# Altium PCB Smartphone-HT.PcbDoc
Units mm, origin at the board's own origin, x right, y up, seen from the top; angles counter-clockwise.
Board outline 20.83 x 13.21 mm, 2 copper layers (Top Layer, Bottom Layer); 6 components, 5 nets, 16 pads, 6 vias.
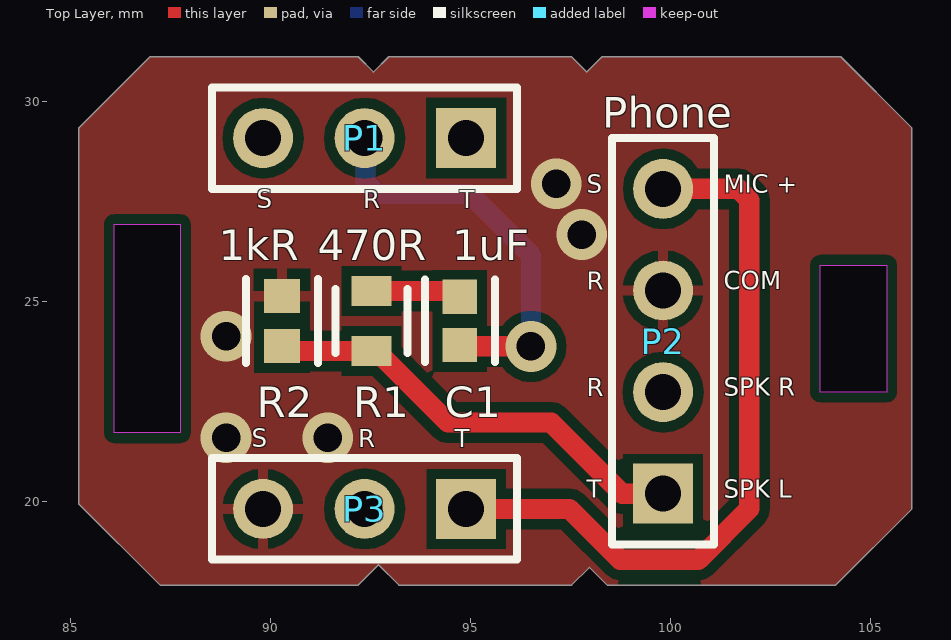
[diagram p0: Top Layer view]
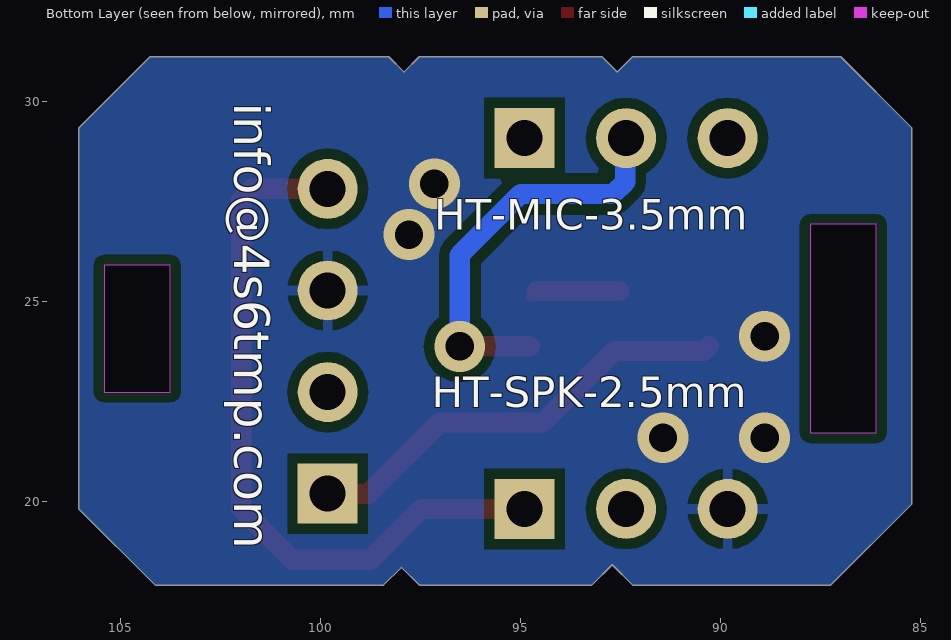
[diagram p1: Bottom Layer view, seen from below]
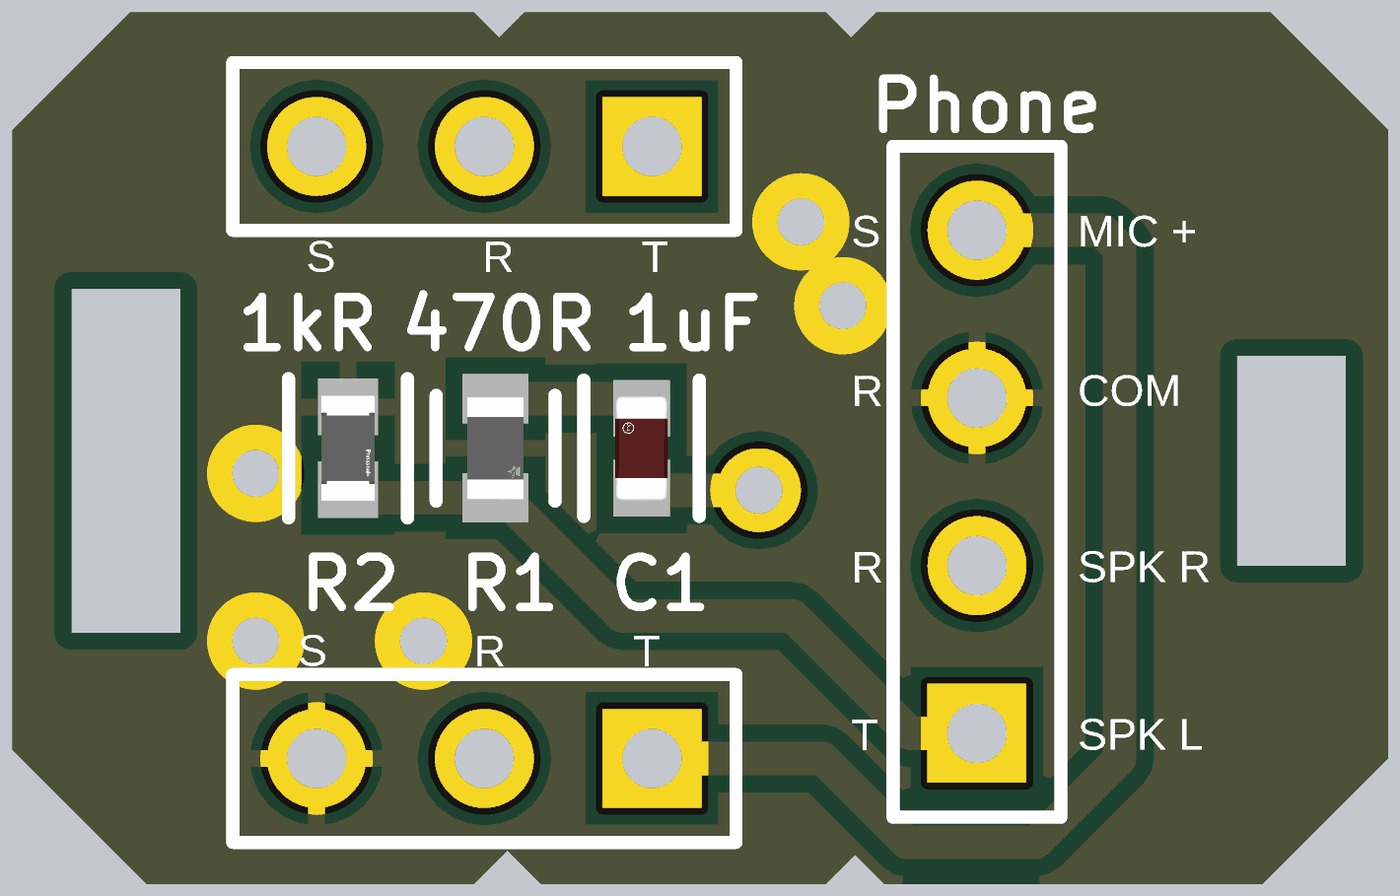
[diagram p2: 3D render of the assembled board from above, using the file's embedded part models]

## Layer stack, top to bottom
Top Solder: solder mask 0.0102, Solder Resist, Dk 3.5
Top Layer: signal copper 0.0356
Dielectric 1: dielectric 0.32, FR-4, Dk 4.8
Bottom Layer: signal copper 0.0356
Bottom Solder: solder mask 0.0102, Solder Resist, Dk 3.5

## Board outline
97.536,17.907 97.981,18.351 98.425,17.907 104.14,17.907 106.045,19.812 106.045,29.337 104.267,31.115 98.298,31.115 97.917,30.734 97.536,31.115 92.964,31.115 92.583,30.734 92.202,31.115 86.995,31.115 85.217,29.337 85.217,19.939 87.249,17.907 92.202,17.907 92.71,18.415 93.218,17.907
cut-out: 103.759,24.511 103.759,25.908 105.41,25.908 105.41,22.733 103.759,22.733
cut-out: 86.106,24.892 86.106,26.924 87.757,26.924 87.757,21.717 86.106,21.717

## Design rules (kind name [scope] priority, off if disabled: settings)
Clearance [All] p1: gap=0.254 ignorepadtopadclearanceinfootprint=FALSE except(0: Arc-Hole Track-Hole SMDPad-Hole THPad-Hole Via-Hole Fill-Hole Poly-Hole Region-Hole Text-Hole)
PolygonConnect [All] p1: connectstyle=Relief reliefconductorwidth=0.254 reliefentries=4 polygonreliefangle="90 Angle" airgapwidth=0.254
RoomDefinition Smartphone-HT [InComponentClass('Smartphone-HT')] p1: confinementstyle=ConfineIn formatcopy=TRUE lockcomponents=FALSE outline 85.217,17.907 106.045,17.907 106.045,31.115 85.217,31.115
RoutingVias [All] p1: holewidth=0.711 width=1.27 viastyle="Through Hole" minholewidth=0.711 minwidth=1.27 maxholewidth=0.711 maxwidth=1.27
SolderMaskExpansion [All] p1: expansion=0.102 istentingtop=FALSE
Width [All] p1: maxlimit=0.762 minlimit=0.254 preferedwidth=0.508
30 further rules are at their usual default settings.

## Components (designator, comment, footprint, x,y, rotation, side; value= is the part's Value field where it differs from the comment)
C1 "1uF" FP-0603-L_1_6_0_15-W_0_8-IPC_C 94.742,24.511 r90 top
P1 "HT-MIC-3.5mm" HDR1X3 94.902,29.083 r180 top
P2 "Phone" HDR1X4 99.822,20.193 r90 top
P3 "HT-SPK-2.5mm" HDR1X3 94.902,19.812 r180 top
R1 "470R" FP-CRCW0603-e3-MFG 92.532,24.511 r270 top
R2 "1kR" FP-ERA3A-IPC_C 90.297,24.511 r270 top

## Footprints (in the part's own frame and the unit in brackets; to place one, negate y for a bottom-side part, rotate by r counter-clockwise, add the part's x,y. Pads: shape width x height; smd on the part's side, far side on the other; paste and mask are expansions set on the pad)
FP-0603-L_1_6_0_15-W_0_8-IPC_C [mm]
  rect 0.858x0.862 smd paste+0 mask+0: 1(-0.602,0) 2(0.602,0)
  silkscreen extent -1.03,-0.87 1.03,0.87, body extent -1.13,-0.58 1.13,0.58, height 0.25
FP-CRCW0603-e3-MFG [mm]
  rect 0.75x1 smd paste+0 mask+0: 1(-0.75,0) 2(0.75,0)
  silkscreen extent -0.8,-0.9 0.8,0.9, body extent -1.22,-0.6 1.22,0.6, height 0.25
FP-ERA3A-IPC_C [mm]
  rect 0.855x0.906 smd paste+0 mask+0: 1(-0.626,0) 2(0.626,0)
  silkscreen extent -1.05,-0.9 1.05,0.9, body extent -1.15,-0.6 1.15,0.6, height 0.25
HDR1X3 [mm] "Connector; Header; 3 Position"
  rect 1.5x1.5 hole 0.9: 1(0,0)
  round 1.5 hole 0.9: 2(2.54,0) 3(5.08,0)
  silkscreen extent -1.27,-1.27 6.35,1.27
HDR1X4 [mm] "Connector; Header; 4 Position"
  rect 1.5x1.5 hole 0.9: 1(0,0)
  round 1.5 hole 0.9: 2(2.54,0) 3(5.08,0) 4(7.62,0)
  silkscreen extent -1.27,-1.27 8.89,1.27

## Part data
C1: library part CMP-2000-07531-4, "Ceramic Capacitor General Use 1uF ±10% 50V X7R 0603", Case Code (Imperial)=0603, Case Code (Metric)=1608, Dielectric=X7R, Max Operating Temperature=125°C, Min Operating Temperature=-55°C, Package Quantity=1, Tolerance=10%, Voltage Rating=50V, Capacitance=1uF, Case/Package=0603, Construction=Flat, Depth=0.8mm, Halogen Free="Halogen Free", Height=0.8mm, Length=1.6mm, Mount="Surface Mount", Packaging="Tape and Reel", Radiation Hardening=No, RoHS Compliant=Yes, Series=M, Termination=SMD/SMT, Thickness=0.037inch, Voltage Rating (DC)=50V, Width=0.031inch
P1 P3: library part "Header 3", "Header, 3-Pin", LatestRevisionDate=17-Jul-2002, LatestRevisionNote="Re-released for DXP Platform.", Publisher="Altium Limited"
P2: library part "Header 4", "Header, 4-Pin", LatestRevisionDate=17-Jul-2002, LatestRevisionNote="Re-released for DXP Platform.", Publisher="Altium Limited"
R1: library part CMP-2000-03373-2, "RES Thick Film, 470Ω, 1%, 0.1W, 100ppm/°C, 0603", Case Code (Imperial)=0603, Case Code (Metric)=1608, Max Operating Temperature=155°C, Max Power Dissipation=100mW, Min Operating Temperature=-55°C, Package Quantity=10, Temperature Coefficient=100ppm/°C, Tolerance=1%, Voltage Rating=75V, Case/Package=0603, Composition="Thick Film", Contact Plating=Tin, Depth=0.85mm, Features="Automotive AEC-Q200", Height=0.45mm, Lead Free="Lead Free", Length=1.55mm, Military Standard=Not, Mount="Surface Mount", Number of Terminations=2, Packaging="Tape and Reel", Power Rating=100mW, Radiation Hardening=No, Resistance=470R, Termination=SMD/SMT, Voltage Rating (DC)=75V, Weight=7.1E-05oz, Width=0.033inch
R2: library part CMP-2000-00873-2, "RES SMD 1K OHM 0.1% 1/10W 0603", Case Code (Imperial)=0603, Case Code (Metric)=1608, Max Operating Temperature=155°C, Max Power Dissipation=100mW, Min Operating Temperature=-55°C, Package Quantity=5000, Resistance Tolerance=0.1%, Resistor Type="Thin Film", Temperature Coefficient=25ppm/°C, Voltage Rating=75V, Case/Package=0603, Construction=Rectangular, Contact Plating=Tin, Depth=0.8mm, Height=0.45mm, Length=1.6mm, Military Standard=Not, Mount="Surface Mount", Number of Pins=2, Number of Terminations=2, Packaging="Tape and Reel", Power Rating=100mW, Radiation Hardening=No, REACH SVHC="No SVHC", Resistance=1kR, RoHS Compliant=Yes, Series=ERA-3A, Size Code=0603, Technology="METAL FILM", Termination=SMD/SMT, Tolerance=0.1%, Width=0.8mm

## Via types
v1: diameter 1.27, hole 0.711, Top Layer to Bottom Layer, 6 vias

## Nets (pads, with @x,y where several pads share a name; then routed paths per layer and width w, separated by ;. In a path a pad name is that pad's centre, name@x,y a point inside that pad or via, vN(x,y) a via of type N, cw(c..) or ccw(c..) an arc to the next point about the centre after c; other vN are vias at no path point)
NetC1_1: C1.1 P1.2 | length 10.1
  Top Layer w0.254: C1.1 C1.1@94.775,23.876
  Top Layer w0.508: C1.1@94.775,23.876 v1(96.52,23.876)
  Bottom Layer w0.508: P1.2 92.385,29.06 92.385,27.984 92.682,27.686 94.996,27.686 96.52,26.162 v1(96.52,23.876)
NetC1_2: C1.2 R1.1 | length 2.3
  Top Layer w0.254: C1.2@94.594,25.261 C1.2
  Top Layer w0.508: R1.1 C1.2@94.594,25.261
NetP2_1: P2.1 R1.2 R2.2 | length 11.1
  Top Layer w0.508: R2.2 90.421,23.761 R1.2 92.657,23.761 94.447,21.971 97.028,21.971 98.806,20.193 P2.1
NetP2_3: P2.3 P3.3 R2.1 | length 0.1
  Top Layer w0.508: P3.3 P3.3@89.822,19.906
  other v1: 88.9,21.59 91.44,21.59 88.9,24.13 97.79,26.67 97.155,27.94
NetP2_4: P2.4 P3.1 | length 18.1
  Top Layer w0.508: P3.1 97.483,19.812 98.753,18.542 100.711,18.542 101.981,19.812 101.981,27.537 101.705,27.813 P2.4
pads on no net: P1.1 P1.3 P2.2 P3.2

## Polygon pours and split planes (outlines as drawn)
NetP2_3 on Bottom Layer "Bottom Layer-No Net" (solid, remove dead copper, pour order 2): 97.536,17.907 97.981,18.351 98.425,17.907 104.14,17.907 106.045,19.812 106.045,29.337 104.267,31.115 98.298,31.115 97.917,30.734 97.536,31.115 92.964,31.115 92.583,30.734 92.202,31.115 86.995,31.115 85.217,29.337 85.217,19.939 87.249,17.907 92.202,17.907 92.71,18.415 93.218,17.907
NetP2_3 on Top Layer "NETP2_3_L01_P003" (solid, pour order 3): 97.536,17.907 97.981,18.351 98.425,17.907 104.14,17.907 106.045,19.812 106.045,29.337 104.267,31.115 98.298,31.115 97.917,30.734 97.536,31.115 92.964,31.115 92.583,30.734 92.202,31.115 86.995,31.115 85.217,29.337 85.217,19.939 87.249,17.907 92.202,17.907 92.71,18.415 93.218,17.907

## Silkscreen, mask and mechanical layers (free items; w line width, h text height)
Top Overlay:
  text "S" at 97.917,27.567 h0.76
  text "MIC +" at 101.346,27.567 h0.76
  text "S" at 89.662,27.186 h0.76
  text "R" at 92.329,27.178 h0.76
  text "T" at 94.742,27.178 h0.76
  text "R" at 97.917,25.146 h0.76
  text "COM" at 101.346,25.154 h0.76
  text "R" at 97.917,22.479 h0.76
  text "SPK R" at 101.346,22.487 h0.76
  text "S" at 89.535,21.217 h0.76
  text "R" at 92.202,21.209 h0.76
  text "T" at 94.615,21.209 h0.76
  text "T" at 97.917,19.939 h0.76
  text "SPK L" at 101.346,19.947 h0.76
Bottom Overlay:
  text "info@4s6tmp.com" at 102.455,29.972 h1.52 r90